# Altium PCB boost_.PcbDoc
Units mil, origin at the board's own origin, x right, y up, seen from the top; angles counter-clockwise.
Board outline 6000 x 4000 mil, 2 copper layers (Top Layer, Bottom Layer); 11 components, 9 nets, 26 pads, 0 vias.
Unrouted connection lines stored in the file: 16.
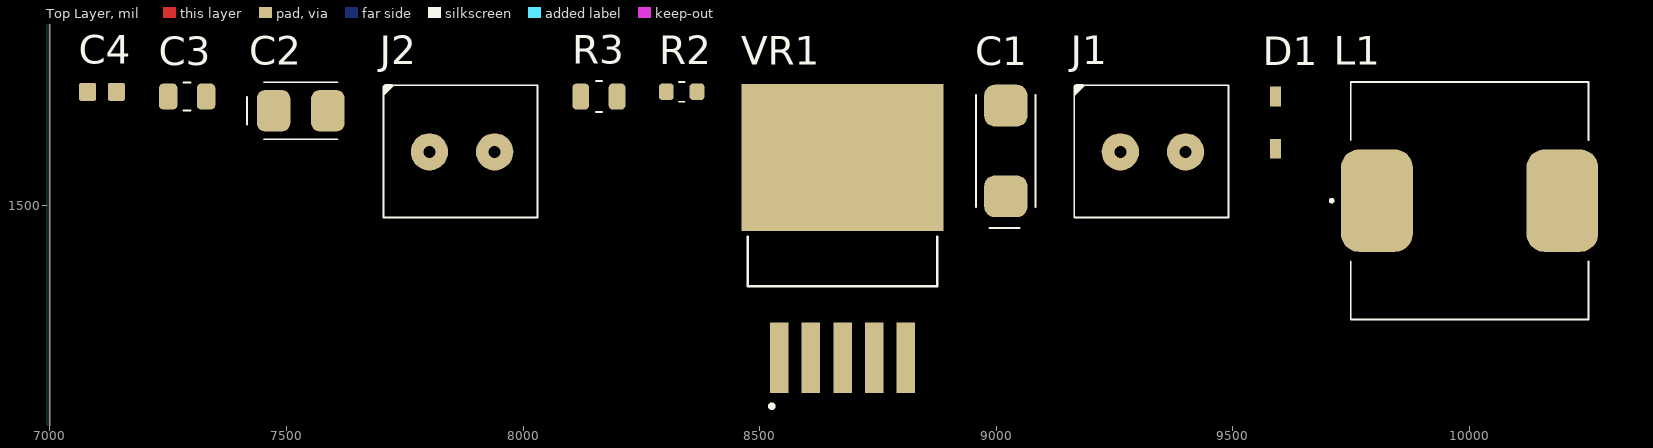
[diagram p0: Top Layer view]
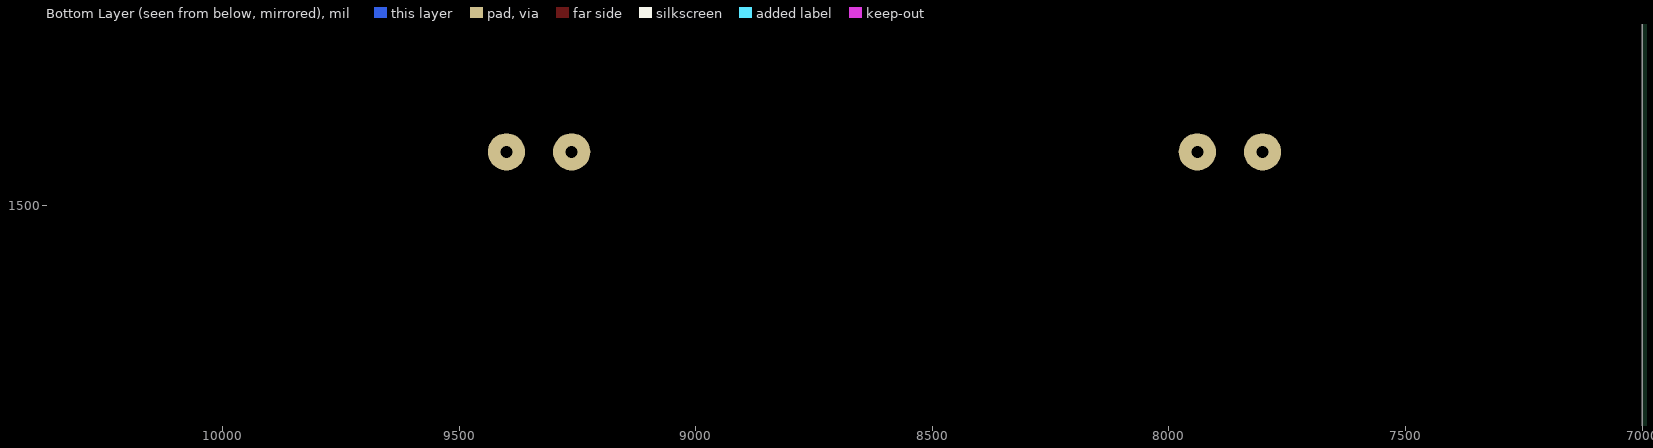
[diagram p1: Bottom Layer view, seen from below]

## Layer stack, top to bottom
Top Solder: solder mask 0.4, Solder Resist, Dk 3.5
Top Layer: signal copper 1.4
Dielectric 1: dielectric 12.6, FR-4, Dk 4.8
Bottom Layer: signal copper 1.4
Bottom Solder: solder mask 0.4, Solder Resist, Dk 3.5

## Board outline
1000,1000 7000,1000 7000,5000 1000,5000

## Design rules (kind name [scope] priority, off if disabled: settings)
Clearance [All] p1: gap=10 ignorepadtopadclearanceinfootprint=FALSE except(0: Arc-Hole Track-Hole SMDPad-Hole THPad-Hole Via-Hole Fill-Hole Poly-Hole Region-Hole Text-Hole)
PolygonConnect [All] p1: connectstyle=Relief reliefconductorwidth=10 reliefentries=4 polygonreliefangle="90 Angle" airgapwidth=10
RoomDefinition boost__ [InComponentClass('boost__')] p1: confinementstyle=ConfineIn formatcopy=TRUE lockcomponents=FALSE outline 7045,1060 10295,1060 10295,1875 7045,1875
RoutingVias [All] p1: holewidth=28 width=50 viastyle="Through Hole" minholewidth=28 minwidth=50 maxholewidth=28 maxwidth=50
SolderMaskExpansion [All] p1: expansion=4 istentingtop=FALSE
Width [All] p1: maxlimit=10 minlimit=10 preferedwidth=10
30 further rules are at their usual default settings.

## Classes and differential pairs
component class boost__: R1

## Components (designator, comment, footprint, x,y, rotation, side; value= is the part's Value field where it differs from the comment)
C1 "TAJC227M010RNJ" KYOCERA_CAP_TAN-C 9020,1615 r90 top
C2 "T491B106M016AT" KEMET_CAP_TAN-B 7530,1700 r0 top
C3 "CL21B334KOCNNNC" SAMSUNG_CAP_0805_095 7290,1730 r0 top
C4 "100unF" CAPC1608X92N 7110,1740 r0 top
D1 "1N4148WS" SODFL2512X100N 9590,1675 r90 top
J1 "OUT" "Klemens 1x2 - 3.5mm" 9325,1615 r0 top
J2 "POWER_IN" "Klemens 1x2 - 3.5mm" 7865,1615 r0 top
L1 "DR127-101-R" EATON_DR127 10000,1510 r0 top
R2 "0603SAJ0202T5E" ROYALOHM_RES_0603 8335,1740 r0 top
R3 "0805S8J0222T5E" ROYALOHM_RES_0805 8160,1730 r0 top
VR1 "LM2577S-ADJ" TO170P1524X483-6N 8675,1430 r90 top

## Footprints (in the part's own frame and the unit in brackets; to place one, negate y for a bottom-side part, rotate by r counter-clockwise, add the part's x,y. Pads: shape width x height; smd on the part's side, far side on the other; paste and mask are expansions set on the pad)
CAPC1608X92N [mm]
  rrect25% 0.92x0.97 smd: 1(-0.775,0) 2(0.775,0)
  body extent -0.8,-0.4 0.8,0.4, height 0.87
EATON_DR127 [mm]
  rrect50% 3.85x5.5 smd mask+0.04: 1(-4.975,0) 2(4.975,0)
  silkscreen extent -7.48,-6.38 6.38,6.38, body extent -6.25,-6.25 6.25,6.25, height 8
KEMET_CAP_TAN-B [mm]
  rrect50% 1.8x2.23 smd paste+0 mask+0.04: 1(-1.46,0) 2(1.46,0)
  silkscreen extent -2.88,-1.53 1.98,1.53, body extent -1.85,-1.5 1.85,1.5, height 2.1
"Klemens 1x2 - 3.5mm" [mm]
  round 2 hole 0.65: 1(-1.6,-0.05) 2(1.9,-0.05)
  silkscreen extent -4.11,-3.58 4.2,3.58, body extent -3.9,-3.45 4.09,3.55, height 8.9
KYOCERA_CAP_TAN-C [mm]
  rrect50% 2.24x2.32 smd mask+0.04: 1(-2.435,0) 2(2.435,0)
  silkscreen extent -4.13,-1.6 3,1.6, body extent -3.05,-1.68 3.05,1.68, height 2.7
ROYALOHM_RES_0603 [mm]
  rrect50% 0.8x0.9 smd paste+0 mask+0.04: 1(-0.825,0) 2(0.825,0)
  silkscreen extent -0.15,-0.53 0.15,0.53, body extent -0.8,-0.4 0.8,0.4, height 0.45
ROYALOHM_RES_0805 [mm]
  rrect50% 0.9x1.397 smd paste+0 mask+0.04: 1(-0.975,0) 2(0.975,0)
  silkscreen extent -0.16,-0.83 0.16,0.83, body extent -1,-0.62 1,0.63, height 0.6
SAMSUNG_CAP_0805_095 [mm]
  rrect50% 1x1.4 smd paste+0 mask+0.04: 1(-1.016,0) 2(1.016,0)
  silkscreen extent -0.19,-0.75 0.19,0.75, body extent -1,-0.63 1,0.64, height 0.96
SODFL2512X100N [mm]
  rect 1.05x0.6 smd: A(1.4,0) C(-1.4,0)
  body extent -1.34,-0.65 1.34,0.65, height 1.15
TO170P1524X483-6N [mm]
  rect 3.79x0.99 smd: 1(-6.4,3.4) 2(-6.4,1.7) 3(-6.4,0) 4(-6.4,-1.7) 5(-6.4,-3.4)
  rect 7.88x10.84 smd paste-6: 6(4.35,0)
  silkscreen extent -9.1,-5.08 0.09,5.08, body extent -7.18,-5.08 7.18,5.08, height 4.65

## Part data
C1: "CAP TANT 220UF 20% 10V 2312", Capacitance="220 µF", Supplier Part Number 1=478-8899-1-ND, Supplier 1=Digi-Key, Supplier 2=Mouser, Supplier 3="Arrow Electronics", Supplier Part Number 2=581-TAJC227M010RNJ, Supplier Part Number 3=TAJC227M010RNJ
C2: "CAP TANT 10UF 20% 16V 1411", Capacitance="10 µF", Supplier Part Number 1=399-3708-1-ND, Supplier 1=Digi-Key, Supplier 2=Farnell, Supplier 3=Mouser, Supplier Part Number 2=2462772, Supplier Part Number 3=80-T491B106M016
C3: "CAP CER 0.33UF 16V X7R 0805", Capacitance="330 nF", Supplier Part Number 1=1276-1797-1-ND, Supplier 1=Digi-Key, Supplier 2=Mouser, Supplier 3="Arrow Electronics", Supplier Part Number 2=187-CL21B334KOCNNNC, Supplier Part Number 3=CL21B334KOCNNNC
C4: library part VJ0603Y104KLXAC5G, "Multilayer Ceramic Capacitors MLCC - SMD/SMT 100nF 25volts 10%", Package=None, Availability=Unavailable, MF="{'manufacturer': u'Vishay'}", MP=VJ0603Y104KLXAC5G, Price=None
D1: "1N4148WS Series 75 V 300 mA Surface Mount Small Signal Diodes - SOD-323F", Package=None, Availability=Unavailable, MF="{'manufacturer': u'ON'}", MP=1N4148WS, Price=None
J1 J2: library part "Klemens 1x2 3.5mm", "Klemens 1x2 3.5mm"
L1: "FIXED IND 100UH 1.96A 163 MOHM", Supplier Part Number 1=513-1038-1-ND, Inductance="100 µH", Supplier 1=Digi-Key, Supplier 2=Farnell, Supplier 3=Mouser, Supplier 4="Arrow Electronics", Supplier Part Number 2=3650504, Supplier Part Number 3=704-DR127-101-R, Supplier Part Number 4=DR127-101-R
R2: "RES SMD 2K OHM 5% 1/10W 0603", Resistance="2 k"
R3: "RES SMD 2.2K OHM 5% 1/8W 0805", Resistance="2.2 k"
VR1: Package=None, Availability=Unavailable, MF="{'manufacturer': u'Texas Instruments'}", MP=LM2577S-ADJ, Price=None

## Nets (pads, with @x,y where several pads share a name; then routed paths per layer and width w, separated by ;. In a path a pad name is that pad's centre, name@x,y a point inside that pad or via, vN(x,y) a via of type N, cw(c..) or ccw(c..) an arc to the next point about the centre after c; other vN are vias at no path point)
GND: C1.2 J1.2 VR1.6
NetC1_1: C1.1 D1.C J1.1
NetC2_2: C2.2 C3.1 C4.1 J2.1
NetC3_2: C3.2 R3.1
NetC4_2: C4.2 J2.2 L1.1 VR1.5
NetD1_A: D1.A L1.2 VR1.4
NetR1_1: R2.1 VR1.2
NetR2_2: R2.2 VR1.3
NetR3_2: R3.2 VR1.1
pads on no net: C2.1